# Altium PCB ControllerDiagrams.PcbDoc
Units mm, origin at the board's own origin, x right, y up, seen from the top; angles counter-clockwise.
Board outline 95.76 x 51.94 mm, 2 copper layers (Top Layer, Bottom Layer); 66 components, 43 nets, 282 pads, 67 vias.
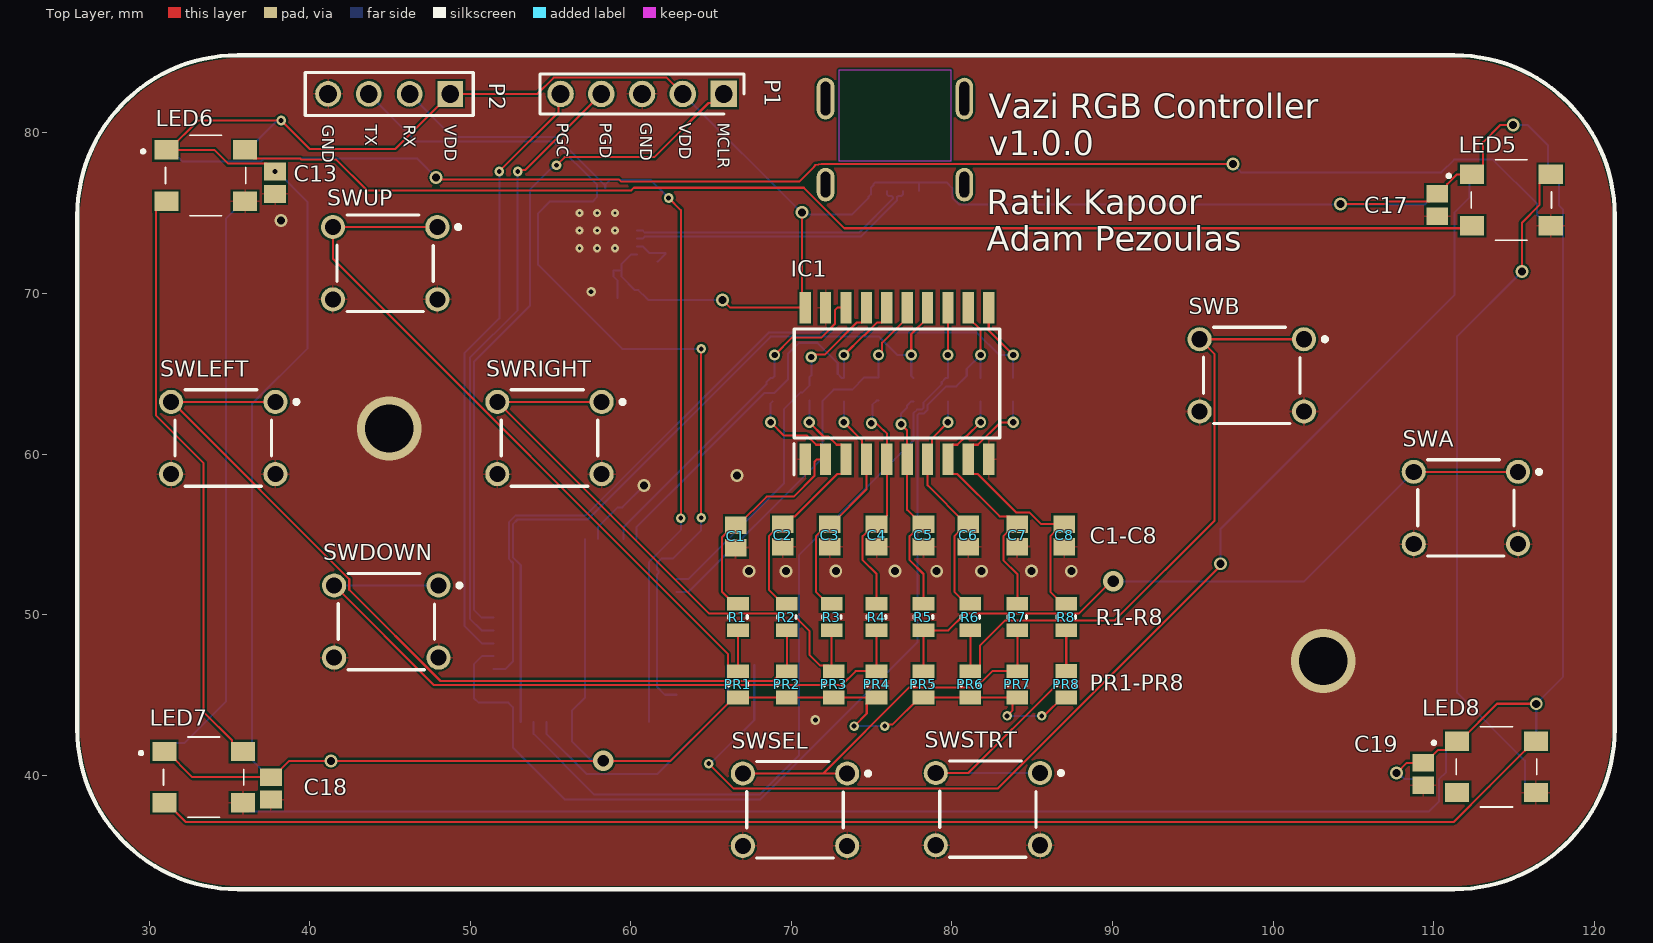
[diagram p0: Top Layer view]
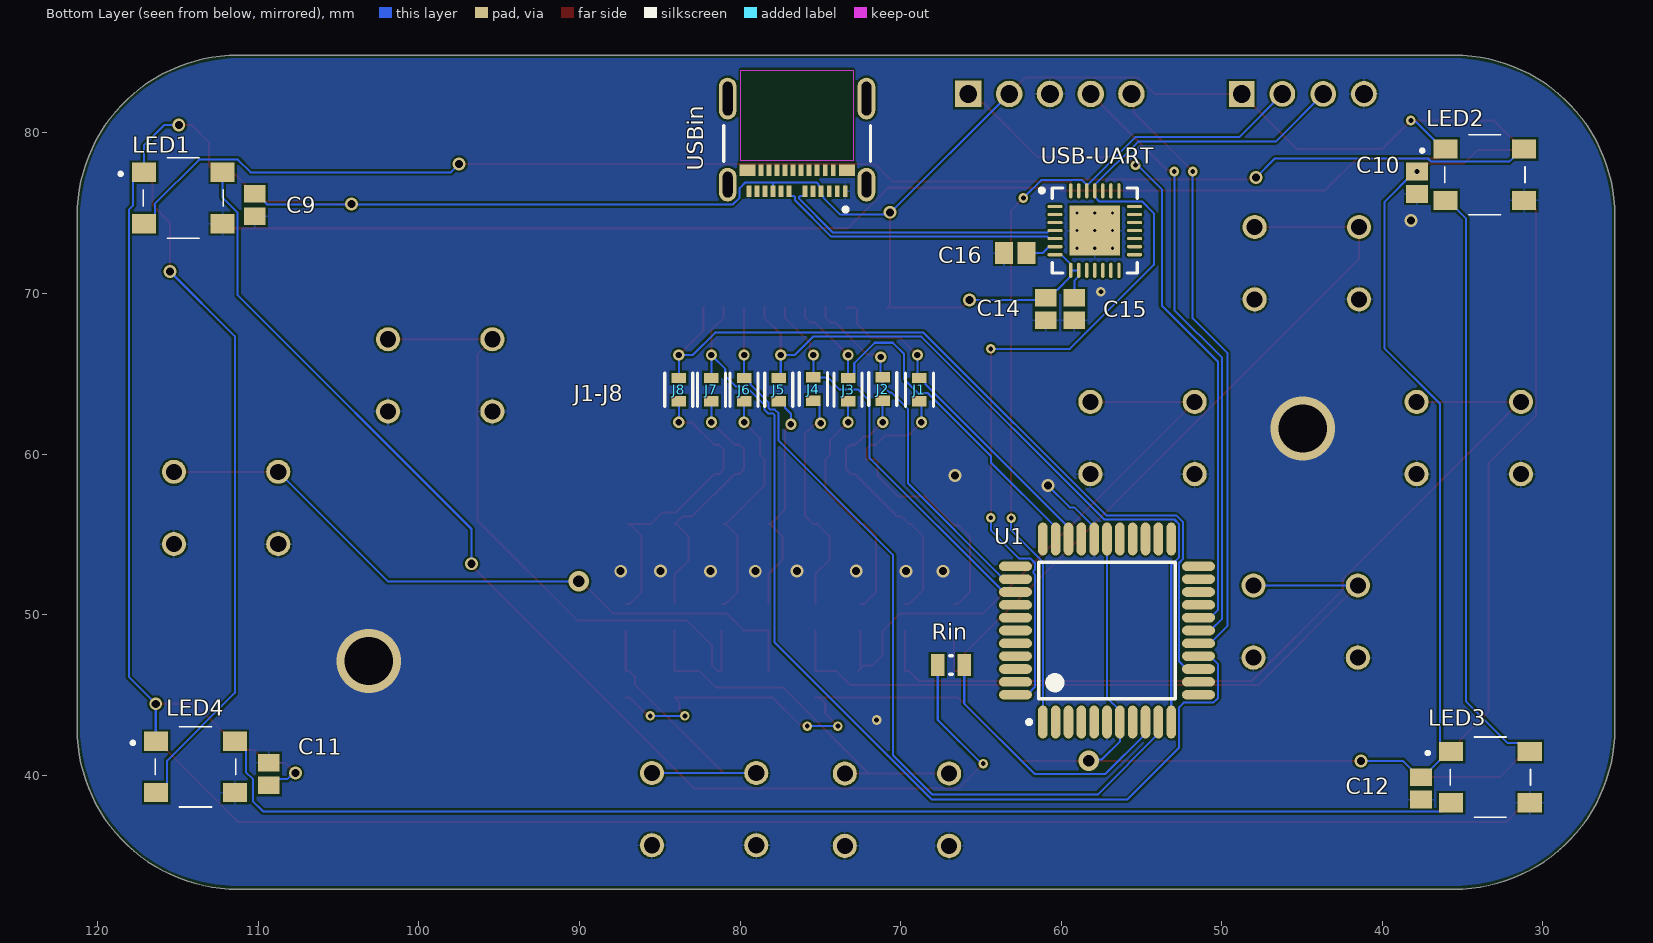
[diagram p1: Bottom Layer view, seen from below]
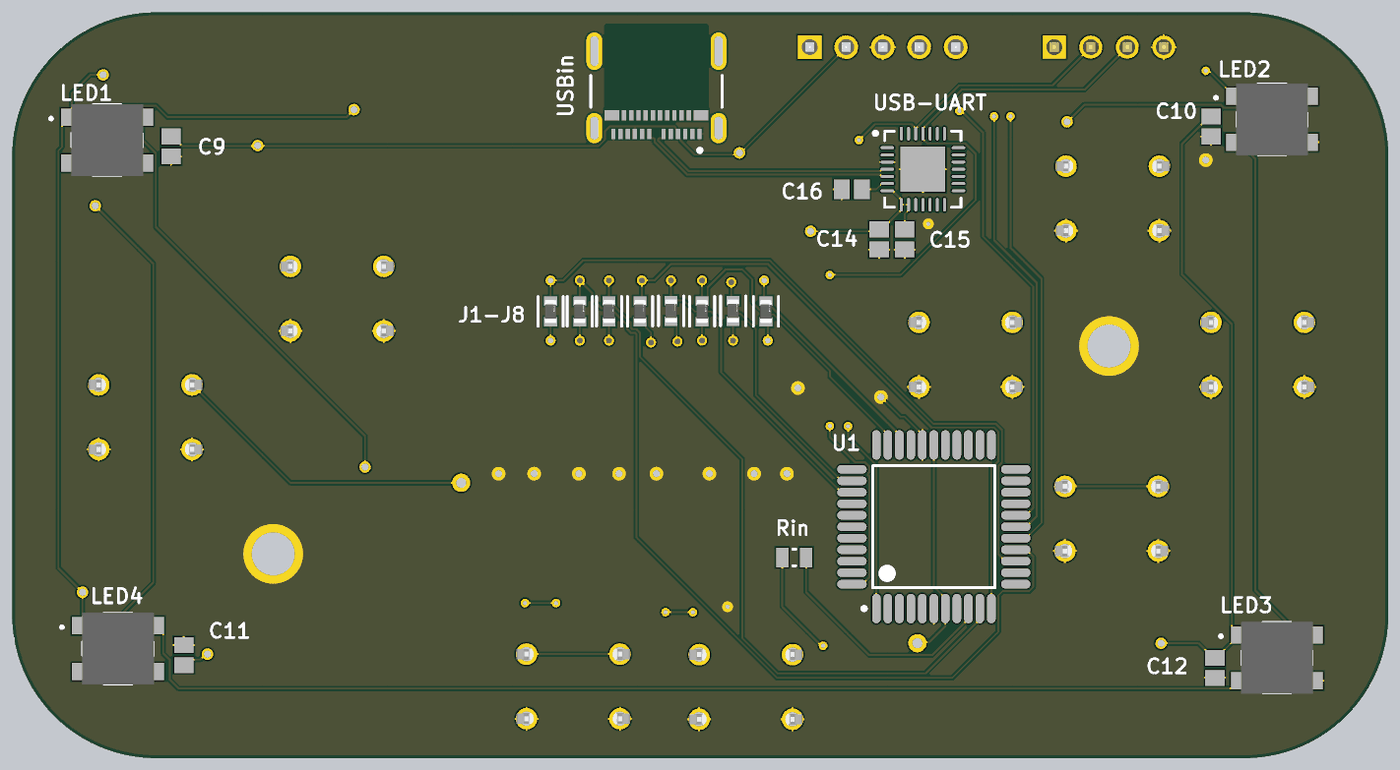
[diagram p2: 3D render of the assembled board from below, using the file's embedded part models]

## Layer stack, top to bottom
Top Solder: solder mask 0.0102, Solder Resist, Dk 3.5
Top Layer: signal copper 0.0356
Dielectric 1: dielectric 0.32, FR-4, Dk 4.8
Bottom Layer: signal copper 0.0356
Bottom Solder: solder mask 0.0102, Solder Resist, Dk 3.5

## Board outline
25.527,42.893 25.527,74.836 cw(c35.527,74.836) 35.527,84.836 111.285,84.836 cw(c111.285,74.836) 121.285,74.836 121.285,42.893 cw(c111.285,42.893) 111.285,32.893 35.527,32.893 cw(c35.527,42.893)

## Design rules (kind name [scope] priority, off if disabled: settings)
BoardOutlineClearance [All] p1: gap=0.2 ignorepadtopadclearanceinfootprint=FALSE
Clearance [All] p1: gap=0.127 ignorepadtopadclearanceinfootprint=FALSE except(0.25: Arc-Hole Track-Hole SMDPad-Hole THPad-Hole Via-Hole Fill-Hole Poly-Hole Region-Hole Text-Hole)
ComponentClearance [All] p1: gap=0.127 collisioncheckmode=3 verticalgap=0.127 showdistances=TRUE
DiffPairsRouting [All] p1: maxlimit=0.254 minlimit=0.127 mostfreqgap=0.127 toplayer_minwidth=0.127 toplayer_maxwidth=25.4 toplayer_prefwidth=0.127 bottomlayer_minwidth=0.127 bottomlayer_maxwidth=25.4 bottomlayer_prefwidth=0.127 maxuncoupledlength=12.7
Height [All] p1: minheight=0 maxheight=1816.048 prefheight=12.7
HoleSize [All] p1: absolutevalues=TRUE maxlimit=6.3 minlimit=0.2 maxpercent=80.000 minpercent=20.000
HoleToHoleClearance [All] p1: gap=0.25 allowstackedmicrovias=FALSE
MinimumAnnularRing [All] p1: minimumring=0.13
MinimumSolderMaskSliver [All] p1: minsoldermaskwidth=0
PlaneClearance [All] p1: clearance=0.127
PlaneConnect PlaneConnectPowerPads [InPadClass('PowerPads')] p1: planeconnectstyle=Direct reliefexpansion=0.508 reliefentries=4 reliefconductorwidth=0.254 reliefairgap=0.254
PlaneConnect [All] p2: pad.planeconnectstyle=Relief pad.reliefexpansion=0.3 pad.reliefentries=4 pad.reliefconductorwidth=0.127 pad.reliefairgap=0.127 via.planeconnectstyle=Direct via.reliefexpansion=0.3 via.reliefentries=4 via.reliefconductorwidth=0.127 via.reliefairgap=0.127
PolygonConnect PolygonConnectPowerPads [All vs (InPadClass('PowerPads'))] p1: connectstyle=Direct reliefconductorwidth=0.254 reliefentries=4 polygonreliefangle="90 Angle" airgapwidth=0.254
PolygonConnect [All] p2: thpad.connectstyle=Relief thpad.reliefconductorwidth=0.127 thpad.reliefentries=4 thpad.polygonreliefangle="90 Angle" thpad.airgapwidth=0.127 smdpad.connectstyle=Relief smdpad.reliefconductorwidth=0.127 smdpad.reliefentries=4 smdpad.polygonreliefangle="90 Angle" smdpad.airgapwidth=0.127 via.connectstyle=Direct via.reliefconductorwidth=0.127 via.reliefentries=4 via.polygonreliefangle="90 Angle" via.airgapwidth=0.127
RoutingLayers NoAutoRoute [InNet('GND')] p1: top layer_v5=FALSE bottom layer_v5=FALSE
RoutingLayers [All] p2: top layer_v5=TRUE bottom layer_v5=TRUE
RoutingVias [All] p1: holewidth=0.3 width=0.6 viastyle="Through Hole" minholewidth=0.3 minwidth=0.6 maxholewidth=0.6 maxwidth=6.6
SilkToSilkClearance [All] p1: silktosilkclearance=0
SilkToSolderMaskClearance [IsPad] p1: minsilkscreentomaskgap=0.127 clearancetoexposedcopper=TRUE
SolderMaskExpansion [All] p1: expansion=0.075 istentingtop=FALSE
Width [All] p1: maxlimit=25.4 minlimit=0.127 preferedwidth=0.127 minimp=50.000000 maximp=50.000000 favimp=50.000000
19 further rules are at their usual default settings.

## Classes and differential pairs
differential pair USB: +USB_P -USB_N

## Components (designator, comment, footprint, x,y, rotation, side; value= is the part's Value field where it differs from the comment)
C1 "100nF" CAPC2013X140X50LL20T25 66.548,54.864 r90 top
C2 "100nF" CAPC2013X140X50LL20T25 69.469,54.929 r90 top
C3 "100nF" CAPC2013X140X50LL20T25 72.39,54.929 r90 top
C4 "100nF" CAPC2013X140X50LL20T25 75.311,54.929 r90 top
C5 "100nF" CAPC2013X140X50LL20T25 78.232,54.929 r90 top
C6 "100nF" CAPC2013X140X50LL20T25 81.026,54.929 r90 top
C7 "100nF" CAPC2013X140X50LL20T25 84.074,54.929 r90 top
C8 "100nF" CAPC2013X140X50LL20T25 86.995,54.929 r90 top
C9 "10uF" CAPC2013X140X50LL20T25 110.236,75.5 r90 bottom
C10 "10uF" CAPC2013X140X50LL20T25 37.846,76.897 r90 bottom
C11 "10uF" CAPC2013X140X50LL20T25 109.347,40.067 r270 bottom
C12 "10uF" CAPC2013X140X50LL20T25 37.592,39.178 r90 bottom
C13 "10uF" CAPC2013X140X50LL20T25 37.846,76.897 r90 top
C14 "1uF" CAPC2013X140X50LL20T25 60.96,69.023 r90 bottom
C15 "0.1uF" CAPC2013X140X50LL20T25 59.182,69.023 r90 bottom
C16 "100nF" CAPC2013X140X50LL20T25 62.865,72.517 r0 bottom
C17 "10uF" CAPC2013X140X50LL20T25 110.236,75.5 r90 top
C18 "10uF" CAPC2013X140X50LL20T25 37.592,39.178 r90 top
C19 "10uF" CAPC2013X140X50LL20T25 109.347,40.067 r90 top
IC1 "74HCT7541D,118" SOIC127P1032X265-20N 76.581,64.389 r90 top
J1 "" FP-ERJ-3GEY0R00V-MFG 68.834,64.008 r270 bottom value=0Ω
J2 "" FP-ERJ-3GEY0R00V-MFG 71.12,64.045 r270 bottom value=0Ω
J3 "" FP-ERJ-3GEY0R00V-MFG 73.279,64.008 r270 bottom value=0Ω
J4 "" FP-ERJ-3GEY0R00V-MFG 75.438,64.045 r270 bottom value=0Ω
J5 "" FP-ERJ-3GEY0R00V-MFG 77.597,64.008 r270 bottom value=0Ω
J6 "" FP-ERJ-3GEY0R00V-MFG 79.756,64.008 r270 bottom value=0Ω
J7 "" FP-ERJ-3GEY0R00V-MFG 81.788,64.008 r270 bottom value=0Ω
J8 "" FP-ERJ-3GEY0R00V-MFG 83.82,64.008 r270 bottom value=0Ω
LED1 "SK6812" ILPHK501RGBWSK68120501 114.681,75.946 r180 bottom
LED2 "SK6812" ILPHK501RGBWSK68120501 33.618,77.394 r180 bottom
LED3 "SK6812" ILPHK501RGBWSK68120501 33.274,39.878 r180 bottom
LED4 "SK6812" ILPHK501RGBWSK68120501 113.919,40.513 r180 bottom
LED5 "SK6812" ILPHK501RGBWSK68120501 114.845,75.82 r0 top
LED6 "SK6812" ILPHK501RGBWSK68120501 33.528,77.343 r0 top
LED7 "SK6812" ILPHK501RGBWSK68120501 33.401,39.878 r0 top
LED8 "SK6812" ILPHK501RGBWSK68120501 113.919,40.513 r0 top
P1 "Programmer" HDRV5W64P0X254_1X5_1270X248X838P 65.786,82.423 r0 top
P2 "UART Breakout" 61300411121 44.958,82.423 r180 top
PR1 "10K" RESC2013X50X30LL20T20 66.675,45.656 r270 top
PR2 "10K" RESC2013X50X30LL20T20 69.723,45.656 r270 top
PR3 "10K" RESC2013X50X30LL20T20 72.644,45.656 r270 top
PR4 "10K" RESC2013X50X30LL20T20 75.311,45.656 r270 top
PR5 "10K" RESC2013X50X30LL20T20 78.232,45.656 r270 top
PR6 "10K" RESC2013X50X30LL20T20 81.153,45.656 r270 top
PR7 "10K" RESC2013X50X30LL20T20 84.074,45.656 r270 top
PR8 "10K" RESC2013X50X30LL20T20 87.122,45.657 r270 top
R1 "1K" RESC2013X50X30LL20T20 66.675,49.847 r90 top
R2 "1K" RESC2013X50X30LL20T20 69.723,49.847 r90 top
R3 "1K" RESC2013X50X30LL20T20 72.517,49.847 r90 top
R4 "1K" RESC2013X50X30LL20T20 75.311,49.847 r90 top
R5 "1K" RESC2013X50X30LL20T20 78.232,49.847 r90 top
R6 "1K" RESC2013X50X30LL20T20 81.153,49.847 r90 top
R7 "1K" RESC2013X50X30LL20T20 84.074,49.847 r90 top
R8 "1K" RESC2013X50X30LL20T20 87.122,49.847 r90 top
Rin "470" RESC2013X50X30LL20T20 66.866,46.863 r0 bottom
SWA "6x6" ESWI-TL1105SPF_V 112.014,56.642 r180 top
SWB "6x6" ESWI-TL1105SPF_V 98.679,64.897 r180 top
SWDOWN "6x6" ESWI-TL1105SPF_V 44.779,49.566 r180 top
SWLEFT "6x6" ESWI-TL1105SPF_V 34.619,60.996 r180 top
SWRIGHT "6x6" ESWI-TL1105SPF_V 54.939,60.996 r180 top
SWSEL "6x6" ESWI-TL1105SPF_V 70.231,37.846 r180 top
SWSTRT "6x6" ESWI-TL1105SPF_V 82.244,37.882 r180 top
SWUP "6x6" ESWI-TL1105SPF_V 44.704,71.882 r180 top
U1 "PIC18F45K42-I/PT" TQFP-PT44_M 57.15,49.007 r90 bottom
USB-UART "CP2102-GMR" SLAB-QFN-28-3125x3125TP_M 57.912,73.914 r180 bottom
USBin "1054500101" FP-1054500101-MFG 76.454,80.137 r0 bottom

## Footprints (in the part's own frame and the unit in brackets; to place one, negate y for a bottom-side part, rotate by r counter-clockwise, add the part's x,y. Pads: shape width x height; smd on the part's side, far side on the other; paste and mask are expansions set on the pad)
61300411121 [mm] "Pin Header, pitch 2.54 mm, THT, Vertical, single row, 4p"
  rect 1.6x1.6 hole 1.1: 1(-3.81,0)
  round 1.6 hole 1.1: 2(-1.27,0) 3(1.27,0) 4(3.81,0)
  silkscreen extent -5.23,-1.34 5.23,1.34, body extent -5.08,-1.27 5.08,1.27, height 8.57
CAPC2013X140X50LL20T25 [mm] "Chip Capacitor, 2-Leads, Body 2.00x1.25mm, IPC High Density"
  rect 1.1x1.35 smd: 1(-0.7,0) 2(0.7,0)
  body extent -1.1,-0.72 1.1,0.72, height 1.4
ESWI-TL1105SPF_V [mm] "THD, 4-Leads, Body 6x6mm"
  round 1.5 hole 1: 1(-3.25,-2.25) 2(3.25,-2.25) 3(-3.25,2.25) 4(3.25,2.25)
  silkscreen extent -4.68,-3 3,3, body extent -3.95,-3 3.95,3, height 7.4
FP-1054500101-MFG [mm]
  rrect100% 1.1x2.1 hole 1.6 slot 0.6 at 0 deg paste-1000 mask+0: 1(-4.32,3.36) 2(4.32,3.36)
  rrect100% 1.1x2.6 hole 2.1 slot 0.6 at 0 deg paste-1000 mask+0: 3(-4.32,-2) 4(4.32,-2)
  rect 0.3x0.7 smd paste+0 mask+0: A1(-3,3.77) A2(-2.5,3.77) A3(-2,3.77) A4(-1.5,3.77) A5(-1,3.77) A6(-0.5,3.77) A7(0.5,3.77) A8(1,3.77) A9(1.5,3.77) A10(2,3.77) A11(2.5,3.77) A12(3,3.77) B2(2.25,2.47) B3(1.75,2.47) B4(1.25,2.47) B5(0.75,2.47) B6(0.25,2.47) B7(-0.25,2.47) B8(-0.75,2.47) B9(-1.25,2.47) B10(-1.75,2.47) B11(-2.25,2.47)
  rect 1x0.7 smd paste+0 mask+0: B1(3.1,2.47) B12(-3.1,2.47)
  Keep-Out Layer region: -3.5,1.88 3.5,1.88 3.5,-3.77 -3.5,-3.77
  silkscreen extent -4.57,-0.3 4.57,5.03
FP-ERJ-3GEY0R00V-MFG [mm]
  rect 0.65x0.9 smd paste+0 mask+0: 1(-0.725,0) 2(0.725,0)
  silkscreen extent -1.03,-0.87 1.03,0.87, body extent -0.8,-0.4 0.8,0.4, height 0.55
HDRV5W64P0X254_1X5_1270X248X838P [mm]
  rect 1.65x1.65 hole 1.1: 1(0,0)
  round 1.65 hole 1.1: 2(-2.54,0) 3(-5.08,0) 4(-7.62,0) 5(-10.16,0)
  silkscreen extent -11.43,-1.24 1.27,1.24, body extent -11.43,-1.24 1.27,1.24, height 8.38
ILPHK501RGBWSK68120501 [mm]
  rect 1.5x1.2 smd: 1(-2.45,1.6) 2(2.45,1.6) 3(2.45,-1.6) 4(-2.45,-1.6)
  silkscreen extent -4,-2.5 2.5,2.5, body extent -2.5,-2.5 2.5,2.5, height 1.8
RESC2013X50X30LL20T20 [mm] "Chip Resistor, 2-Leads, Body 2.00x1.25mm, IPC High Density"
  rect 0.85x1.35 smd: 1(-0.825,0) 2(0.825,0)
  silkscreen extent -0.1,-0.58 0.1,0.58, body extent -1.1,-0.72 1.1,0.72, height 0.5
SLAB-QFN-28-3125x3125TP_M [mm] "QFN, 28-Leads, Body 5x5mm, Pitch 0.5mm, Thermal Pad 3.13x3.13mm, IPC Low Density"
  oval 0.95x0.2 smd: 1(-2.475,1.5) 2(-2.475,1) 3(-2.475,0.5) 4(-2.475,0) 5(-2.475,-0.5) 6(-2.475,-1) 7(-2.475,-1.5) 15(2.475,-1.5) 16(2.475,-1) 17(2.475,-0.5) 18(2.475,0) 19(2.475,0.5) 20(2.475,1) 21(2.475,1.5)
  oval 0.2x0.95 smd: 8(-1.5,-2.475) 9(-1,-2.475) 10(-0.5,-2.475) 11(0,-2.475) 12(0.5,-2.475) 13(1,-2.475) 14(1.5,-2.475) 22(1.5,2.475) 23(1,2.475) 24(0.5,2.475) 25(0,2.475) 26(-0.5,2.475) 27(-1,2.475) 28(-1.5,2.475)
  rect 3.13x3.13 smd: 29(0,0)
  silkscreen extent -3.42,-2.65 2.65,2.65, body extent -2.5,-2.5 2.5,2.5, height 1
SOIC127P1032X265-20N [mm]
  rect 1.95x0.7 smd: 1(-4.725,5.715) 2(-4.725,4.445) 3(-4.725,3.175) 4(-4.725,1.905) 5(-4.725,0.635) 6(-4.725,-0.635) 7(-4.725,-1.905) 8(-4.725,-3.175) 9(-4.725,-4.445) 10(-4.725,-5.715) 11(4.725,-5.715) 12(4.725,-4.445) 13(4.725,-3.175) 14(4.725,-1.905) 15(4.725,-0.635) 16(4.725,0.635) 17(4.725,1.905) 18(4.725,3.175) 19(4.725,4.445) 20(4.725,5.715)
  silkscreen extent -5.7,-6.4 3.4,6.42, body extent -5.16,-6.4 5.16,6.4, height 2.65
TQFP-PT44_M [mm] "Thin QFP, 44-Leads, Body 10x10mm, Pitch 0.8mm, IPC Low Density"
  oval 2.05x0.6 smd: 1(-5.7,4) 2(-5.7,3.2) 3(-5.7,2.4) 4(-5.7,1.6) 5(-5.7,0.8) 6(-5.7,0) 7(-5.7,-0.8) 8(-5.7,-1.6) 9(-5.7,-2.4) 10(-5.7,-3.2) 11(-5.7,-4) 23(5.7,-4) 24(5.7,-3.2) 25(5.7,-2.4) 26(5.7,-1.6) 27(5.7,-0.8) 28(5.7,0) 29(5.7,0.8) 30(5.7,1.6) 31(5.7,2.4) 32(5.7,3.2) 33(5.7,4)
  oval 0.6x2.05 smd: 12(-4,-5.7) 13(-3.2,-5.7) 14(-2.4,-5.7) 15(-1.6,-5.7) 16(-0.8,-5.7) 17(0,-5.7) 18(0.8,-5.7) 19(1.6,-5.7) 20(2.4,-5.7) 21(3.2,-5.7) 22(4,-5.7) 34(4,5.7) 35(3.2,5.7) 36(2.4,5.7) 37(1.6,5.7) 38(0.8,5.7) 39(0,5.7) 40(-0.8,5.7) 41(-1.6,5.7) 42(-2.4,5.7) 43(-3.2,5.7) 44(-4,5.7)
  silkscreen extent -5.82,-4.25 4.25,4.98, body extent -5,-5 5,5, height 1.2

## Part data
C1 C2 C3 C4 C5 C6 C7 C8 C9 C10 C11 C12 C13 C14 C15 C16 C17 C18 C19: library part CMP-2000-05810-1, "Chip Capacitor, 2.2 uF, +/- 10%, 10 V, -55 to 85 degC, 0805 (2012 Metric), RoHS, Tape and Reel", Capacitance=2.2µF, Case Size/Dimension=0805, Dielectric=X5R, Manufacturer=AVX, Package Description="2-Pin Surface Mount Device, Body 2.01 x 1.25 mm", Rated Voltage=10V, Tolerance (%)=±10%, Datasheet URL=http://datasheets.avx.com/cx5r.pdf, Datasheet Version=05/2016, Manufacturer URL=http://www.avx.com/, Mounting Technology=SurfaceMount, Package Reference=0805
IC1: "Integrated Circuit", Manufacturer_Name=Nexperia, Mouser Part Number=771-74HCT7541D-T, Arrow Part Number=74HCT7541D,118, Arrow Price/Stock=https://www.arrow.com/en/products/74hct7541d118/nexperia, Datasheet Link=https://assets.nexperia.com/documents/data-sheet/74HC_HCT7541.pdf, Height=2.65mm, Manufacturer_Part_Number=74HCT7541D,118, Mouser Price/Stock=https://www.mouser.co.uk/ProductDetail/Nexperia/74HCT7541D118?qs=me8TqzrmIYUuRbgAkVALbQ%3D%3D
J1 J2 J3 J4 J5 J6 J7 J8: library part CMP-2000-00700-2, "RES SMD 0 OHM JUMPER 1/10W 0603", Manufacturer=Panasonic, Manufacturer Part Number=ERJ-3GEY0R00V, Package=0603, Power Rating=0.1W, Resistance=0Ω, Temperature="-55°C to +155°C", Temperature Coefficient=-100/+600ppm/°C, Temperature Range High=+155°C, Temperature Range Low=-55°C, Tolerance=5%, Voltage Rating=75V, Automotive=Yes, Automotive Grade="Grade 0", Category=Res, ComponentLink2Description=Datasheet, ComponentLink2URL=https://industrial.panasonic.com/cdbs/www-data/pdf/RDA0000/AOA0000C301.pdf, Composition="Thick Film", Device Class L1="Passive Components", Device Class L2=Resistors, Device Class L3="Chip SMD Resistors", Digikey Description="RES SMD 0 OHM JUMPER 1/10W 0603", Footprint Url=https://industrial.panasonic.com/cdbs/www-data/pdf/RDA0000/DMA0000COL17.pdf, Height=0.55mm, Ipc Land Pattern Name=RESC16080X45, Lead Free=Yes, Mouser Description="Resistor, Chip Thick Film, 0 Ohm, 0.1w, Resistor, Chip Thick Film, 0 Ohm, 0.1w, 5%", Octopart=https://octopart.com/erj-3gey0r00v-panasonic-55389238, RoHS=TRUE, Series=ERJ
LED1 LED2 LED3 LED4 LED5 LED6 LED7 LED8: library part ILPH-K501-RGBW-SK6812-05-01, "LED", Manufacturer_Name="Intelligent LED Solutions", Datasheet Link=http://uk.rs-online.com/web/p/products/1921700, Height=1.7mm, Manufacturer_Part_Number=ILPH-K501-RGBW-SK6812-05-01
P1: library part HTSW-105-07-L-S, "Connector", Manufacturer_Name=SAMTEC, Mouser Part Number=200-HTSW10507LS, Datasheet Link=https://componentsearchengine.com/Datasheets/2/HTSW-105-07-L-S.pdf, Height=8.38mm, Manufacturer_Part_Number=HTSW-105-07-L-S, Mouser Price/Stock=https://www.mouser.co.uk/ProductDetail/Samtec/HTSW-105-07-L-S?qs=0lQeLiL1qybu1UQ%2Fa8lryA%3D%3D
P2: library part CMP-1502-01064-1, "THT Vertical Pin Header WR-PHD, Pitch 2.54 mm, Single Row, 4 pins", Contact Resistance=20mOhm, Manufacturer="Wurth Elektronik", Operating Temperature=-40to105degC, Package Reference=61300411121, Rated Current=3A, Withstanding Voltage=500VAC, Working Voltage=250VAC, Datasheet URL=https://katalog.we-online.de/em/datasheet/6130xx11121.pdf, Gender=Male, Manufacturer URL=http://www.we-online.de, Mounting Technology=THT, Orientation=Vertical, Packaging=Bag, Part Number=61300411121, Pin Number=4, Pitch=2.54mm, Publisher=WurthElektronik, Row Number=Single
PR1 PR2 PR3 PR4 PR5 PR6 PR7 PR8 R1 R2 R3 R4 R5 R6 R7 R8 Rin: library part CMP-2001-04896-1, Manufacturer="Vishay Dale", Part Number=CRCW08050000Z0EA
SWA SWB SWDOWN SWLEFT SWRIGHT SWSEL SWSTRT SWUP: library part CMP-2000-07248-1, "Tact Switch, SPST-NO, 50 mA, 12 VDC, -20 to 70 degC, 4-Pin THD, RoHS, Bulk", Manufacturer=E-Switch, Package Description="4-Pin Through Hole Device, Body 6 x 6 mm", Package Reference=TL1105SPF, Actuation Force=1.6N, Actuator Style=RoundButton, Contact Material=Silver, Datasheet URL=https://www.e-switch.com/system/asset/product_line/data_sheet/140/TL1105.pdf, Datasheet Version=12/2013, Manufacturer URL=http://www.e-switch.ch/en/, Mounting Technology=ThroughHole, Package URL=http://spec_sheets.e-switch.com/specs/P010201.pdf, Size=6x6mm, Termination Style=RightAngle
U1: library part CMP-0115-00678-1, "Enhanced FLASH Microcontroller, 8K (x14-Bit words) FLASH, 368 Bytes RAM, 44-Pin TQFP, Standard VDD Range, Industrial Temperature", Code_JEDEC=MS-026, ComponentAvailability="Unknown. Contact manufacturer to determine status.", DatasheetVersion="revB, Oct-2003", PackageDescription="44-Lead Plastic Thin Quad Flatpack (PT) - 10x10x1mm Body, 2.00mm [TQFP]", PackageReference=TQFP-PT44, PackageVersion="revBB, Aug-2009"
USB-UART: library part CMP-2000-04924-1, "Single-Chip USB to URAT Bridge, 3.3 V, -40 to 85 degC, 28-Pin QFN, RoHS, Tape and Reel", Manufacturer="Silicon Labs", Operating Supply Voltage (Max)=3.6V, Operating Supply Voltage (Min)=3V, Operating Supply Voltage (Typ)=3.3V, Operating Temperature (Max)=85C, Operating Temperature (Min)=-40C, Operating Temperature Classification=Industrial, Package Description="28-Pin Quad-Flat No-Leads Package, Body 5 x 5 mm, Pitch 0.5 mm", Package Reference=QFN-28, Package Type=QFNEP, Supply Current=26mA, Data Rate=1000kbps, Datasheet URL=http://www.mouser.com/ds/2/368/CP2102-9-247052.pdf, Datasheet Version="Rev. 1.6, 12/2013", Interface Circuit Standard 1=RS-232, Manufacturer URL=http://www.silabs.com/, Mounting=SurfaceMount, Number of Channels=1, Package URL=http://www.silabs.com/Support%20Documents/TechnicalDocs/C8051T61x.pdf, Packaging=TapeandReel, Pin Count=28, Rad Hardened=No, Transmitter and Receiver FIFO Counter=No
USBin: library part CMP-04767-000004-1, "CONN RCP USB3.1 TYPEC 24P SMD RA", Current Rating=0.25/1.25/5A, Manufacturer=Molex, Package=0, Temperature="-30°C to +85°C", Temperature Range High=+85°C, Temperature Range Low=-30°C, Voltage Rating=30V, Automotive=No, Category=Conn, ComponentLink2Description=Datasheet, ComponentLink2URL=https://www.molex.com/webdocs/datasheets/pdf/en-us/1054500101_IO_CONNECTORS.pdf, Conn Orientation="Right Angle", Contact Material=Gold,Nickel, Device Class L1=Connectors, Device Class L2="USB Connectors", Device Class L3=unset, Digikey Description="CONN RCP USB3.1 TYPEC 24P SMD RA", Footprint Url=https://www.molex.com/pdm_docs/sd/1054500101_sd.pdf, Height=3.44mm, Is Female=yes, Lead Free=Yes, Manufacturer Part Number=1054500101, Mouser Description="USB Shielded I/O Receptacle; Type C; Right Angle; Surface Mount; Gold over Nickel", Number Of Contacts=24, Octopart=https://octopart.com/105450-0101-molex-68082325, Pitch=0.5mm, RoHS=TRUE, Shielding=true, Usb Standard="USB 3.1"

## Via types
v1: diameter 0.8, hole 0.5, Top Layer to Bottom Layer, 22 vias
v2: diameter 0.6, hole 0.3, Top Layer to Bottom Layer, 16 vias
v3: diameter 0.7, hole 0.4, Top Layer to Bottom Layer, 16 vias
v4: diameter 0.5, hole 0.2, Top Layer to Bottom Layer, 9 vias
v5: diameter 4, hole 3, Top Layer to Bottom Layer, 2 vias
v6: diameter 1.27, hole 0.711, Top Layer to Bottom Layer, 2 vias

## Nets (pads, with @x,y where several pads share a name; then routed paths per layer and width w, separated by ;. In a path a pad name is that pad's centre, name@x,y a point inside that pad or via, vN(x,y) a via of type N, cw(c..) or ccw(c..) an arc to the next point about the centre after c; other vN are vias at no path point)
+5: C9.2 C10.2 C11.2 C12.2 C13.2 C14.2 C15.2 C17.2 C18.2 C19.2 IC1.20 LED1.1 LED2.1 LED3.1 LED4.1 LED5.1 LED6.1 LED7.1 LED8.1 P1.2 P2.1 PR1.2 PR2.2 PR3.2 PR4.2 PR5.2 PR6.2 PR7.2 PR8.2 U1.7 U1.28 USB-UART.7 USB-UART.8 USB-UART.9 USBin.A4 USBin.A9 | length 313.1
  Top Layer w0.127: LED6.1 LED6.1@31.228,78.943 ; LED7.1@31.101,41.478 32.701,39.878 C18.2 37.717,39.878 38.733,40.894 v6(58.293,40.894) 62.488,40.894 66.425,44.831 PR1.2 PR2.2 PR3.2 PR4.2@75.061,44.831 ; v2(37.846,77.597) 37.359,78.084 34.929,78.084 34.07,78.943 LED6.1@31.228,78.943 ; P1.2 62.231,83.438 55.205,83.438 54.19,82.423 P2.1 45.339,78.994 40.005,78.994 v2(38.227,80.772) 33.057,80.772 LED6.1@31.228,78.943 ; v1(65.722,69.591) 66.199,69.114 IC1.20 70.675,69.305 v1(70.675,75.052) ; v2(73.914,43.053) 74.7,43.839 74.7,44.469 PR4.2@75.061,44.831 ; PR4.2 PR4.2@75.061,44.831 ; v2(75.819,43.053) 75.91,43.144 76.295,43.144 77.982,44.831 PR5.2 PR6.2 PR7.2 83.786,44.543 83.786,44.035 v2(83.439,43.688) ; v2@85.818,43.779 86.872,44.832 PR8.2 ; v1(104.203,75.56) 106.992,75.56 107.146,75.713 C17.2@109.749,75.713 ; v1(107.696,40.132) 108.331,40.767 C19.2 109.472,40.767 110.281,41.576 110.932,41.576 LED8.1 111.619,42.113 113.951,44.445 v1(116.395,44.445) ; C17.2 110.361,76.2 110.847,76.687 110.847,76.811 111.456,77.42 LED5.1 112.545,77.42 113.082,77.956 113.082,79.427 114.144,80.489 v1(114.958,80.489)
  Bottom Layer w0.127: LED3.1@35.874,41.478 36.981,40.371 36.981,40.365 37.467,39.878 C12.2 37.717,39.878 38.728,40.889 v1(41.338,40.889) ; LED2.1@36.218,78.994 37.905,80.681 38.136,80.681 v2(38.227,80.772) ; LED3.1@36.41,41.914 36.41,63.118 39.878,66.585 39.878,75.69 C10.2@37.971,77.597 ; U1.28 57.15,44.832 56.35,44.032 U1.7 56.35,42.091 57.468,40.974 58.213,40.974 v6(58.293,40.894) ; C15.2 59.182,70.794 58.912,71.064 USB-UART.9 USB-UART.8 ; USB-UART.7 60.012,72.414 59.412,71.814 USB-UART.8 ; P1.2 70.739,74.93 73.786,74.93 74.795,75.938 74.795,76.008 74.954,76.167 USBin.A4 74.954,76.567 75.114,76.727 75.114,76.796 75.225,76.907 77.978,76.907 ; v1(65.722,69.591) 61.092,69.591 C14.2 60.473,70.21 60.267,70.21 59.412,71.064 USB-UART.8 ; v2(73.914,43.053) v2(75.819,43.053) ; USBin.A9 77.954,76.884 77.978,76.907 ; v2(83.439,43.688) v2(85.598,43.688) ; v1(107.696,40.132) 107.823,40.132 108.204,39.751 108.963,39.751 C11.2 ; C9.2 110.111,76.2 109.447,75.536 80.467,75.536 80.033,75.97 80.033,76.557 79.683,76.907 77.978,76.907 ; v1(114.958,80.489) 115.853,80.489 117.131,79.211 LED1.1 117.281,77.546 117.818,77.009 117.818,75.465 118.072,75.211 118.072,46.122 v1(116.395,44.445) 116.395,42.139 LED4.1
GND: C1.1 C2.1 C3.1 C4.1 C5.1 C6.1 C7.1 C8.1 C9.1 C10.1 C11.1 C12.1 C13.1 C14.1 C15.1 C16.2 C17.1 C18.1 C19.1 IC1.1 IC1.10 IC1.19 LED1.3 LED2.3 LED3.3 LED4.3 LED5.3 LED6.3 LED7.3 LED8.3 P1.3 P2.4 SWA.3 SWA.4 SWB.3 SWB.4 SWDOWN.3 SWDOWN.4 SWLEFT.3 SWLEFT.4 SWRIGHT.3 SWRIGHT.4 SWSEL.3 SWSEL.4 SWSTRT.3 SWSTRT.4 SWUP.3 SWUP.4 U1.6 U1.29 USB-UART.3 USB-UART.29 USBin.A1 USBin.A12 | length 4.7
  Bottom Layer w0.127: U1.29 57.95,55.432 59.194,56.676 59.47,56.676 v1(60.833,58.039)
  other v1: 67.373,52.7 69.659,52.7 72.771,52.705 76.454,52.705 79.057,52.7 81.851,52.7 84.963,52.705 87.439,52.7 66.611,58.669 38.227,74.549
  other v2: 71.501,43.434 57.531,70.104
  other v4: 56.812,72.814 57.912,72.814 59.012,72.814 56.812,73.914 57.912,73.914 59.012,73.914 56.812,75.014 57.912,75.014 59.012,75.014
  other v5: 103.124,47.117 44.958,61.595
NetC1_2: C1.2 IC1.2 J1.2 R1.2 | length 19.8
  Top Layer w0.127: R1.2 66.425,50.672 65.683,51.414 65.683,54.824 66.423,55.564 C1.2 66.673,55.564 68.459,57.35 70.146,57.35 71.445,58.649 71.445,59.514 71.595,59.664 IC1.2 72.136,60.289 71.849,60.575 71.549,60.575 70.974,61.151 69.532,61.151 v3(68.707,61.976)
  Bottom Layer w0.127: v3(68.707,61.976) 68.707,63.156 J1.2
NetC2_2: C2.2 IC1.3 J2.2 R2.2 | length 16.9
  Top Layer w0.127: R2.2 69.473,50.672 68.604,51.541 68.604,54.888 69.344,55.629 C2.2 69.956,56.115 70.229,56.115 72.865,58.752 73.119,58.752 73.406,59.039 IC1.3 73.406,60.289 73.119,60.575 72.819,60.575 72.305,61.089 72.007,61.089 v3(71.12,61.976)
  Bottom Layer w0.127: v3(71.12,61.976) J2.2
NetC3_2: C3.2 IC1.4 J3.2 R3.2 | length 15.2
  Top Layer w0.127: R3.2 72.267,50.672 71.525,51.414 71.525,54.888 72.265,55.629 C3.2 72.515,55.629 74.676,57.79 IC1.4 74.389,59.95 74.389,60.866 v3(73.279,61.976)
  Bottom Layer w0.127: v3(73.279,61.976) J3.2
NetC4_2: C4.2 IC1.5 J4.2 R4.2 | length 14.6
  Top Layer w0.127: v3(74.991,61.91) 75.3,61.91 75.721,61.488 75.743,61.488 75.946,61.286 IC1.5 75.946,56.139 75.436,55.629 C4.2 75.186,55.629 74.446,54.888 74.446,53.394 75.311,52.528 R4.2
  Bottom Layer w0.127: v3(74.991,61.91) 75.051,61.97 75.051,63.059 75.313,63.32 J4.2
NetC5_2: C5.2 IC1.6 J5.2 R5.2 | length 14.5
  Top Layer w0.127: v3(76.835,61.849) 76.835,61.847 77.216,61.466 77.216,56.52 C5.2@78.107,55.629 ; R5.2 78.232,52.528 77.367,53.394 77.367,54.888 C5.2@78.107,55.629 ; C5.2 C5.2@78.107,55.629
  Bottom Layer w0.127: v3@76.725,61.959 v3(76.835,61.849) 76.835,62.521 77.21,62.896 77.21,63.021 77.472,63.283 J5.2
NetC6_2: C6.2 IC1.7 J6.2 R6.2 | length 15.1
  Top Layer w0.127: v3(79.756,61.976) 78.773,60.993 78.773,59.95 IC1.7 78.486,58.044 C6.2@80.901,55.629 ; C6.2 C6.2@80.901,55.629 ; R6.2 80.903,50.672 80.161,51.414 80.161,54.888 C6.2@80.901,55.629
  Bottom Layer w0.127: v3(79.756,61.976) J6.2
NetC7_2: C7.2 IC1.8 J7.2 R7.2 | length 16.8
  Top Layer w0.127: v3(81.788,61.976) 80.901,61.089 80.857,61.089 80.343,60.575 80.043,60.575 79.756,60.289 IC1.8 79.756,59.039 80.043,58.752 80.343,58.752 82.98,56.115 83.587,56.115 C7.2 83.949,55.629 83.209,54.888 83.209,53.394 84.074,52.528 R7.2
  Bottom Layer w0.127: v3(81.788,61.976) J7.2
NetC8_2: C8.2 IC1.9 J8.2 R8.2 | length 19.3
  Top Layer w0.127: v3(83.82,61.976) 83.801,61.957 82.995,61.957 81.613,60.575 81.313,60.575 81.026,60.289 IC1.9 81.026,59.039 81.313,58.752 81.613,58.752 83.996,56.369 84.828,56.369 85.568,55.629 C8.2@86.87,55.629 ; C8.2 C8.2@86.87,55.629 ; R8.2 86.872,50.672 86.13,51.414 86.13,54.888 C8.2@86.87,55.629
  Bottom Layer w0.127: v3(83.82,61.976) J8.2
NetC16_1: C16.1 USB-UART.6 | length 2.7
  Bottom Layer w0.127: USB-UART.6 60.762,72.914 61.159,72.517 C16.1 62.165,72.461 C16.1@61.678,71.975
NetIC1_11: IC1.11 J8.1 U1.14 | length 52.1
  Top Layer w0.127: IC1.11 82.296,67.691 v3(83.82,66.167)
  Bottom Layer w0.127: U1.14 52.175,46.607 52.665,47.098 52.665,53.21 52.406,53.47 52.406,55.74 52.842,56.177 57.193,56.177 68.58,67.564 81.558,67.564 82.955,66.167 v3(83.82,66.167) J8.1
NetIC1_12: IC1.12 J7.1 U1.15 | length 64.1
  Top Layer w0.127: IC1.12 81.026,68.489 81.788,67.727 v3(81.788,66.167)
  Bottom Layer w0.127: U1.15 50.725,47.407 50.234,46.917 50.234,44.804 50.522,44.517 52.378,44.517 52.66,44.235 52.66,42.379 52.665,42.373 52.665,41.696 55.879,38.482 68.073,38.482 77.851,48.26 77.851,62.422 77.942,62.513 78.231,62.513 78.492,62.774 78.492,63.063 79.646,64.218 80.285,64.218 80.927,64.86 80.927,65.306 v3(81.788,66.167) J7.1
NetIC1_13: IC1.13 J6.1 U1.10 | length 51.8
  Top Layer w0.127: v3(79.756,66.167) IC1.13
  Bottom Layer w0.127: U1.10 53.95,42.57 57.732,38.788 68.019,38.788 70.485,41.253 70.485,53.721 77.597,60.833 77.597,62.528 77.837,62.767 78.126,62.767 78.238,62.879 78.238,63.215 79.369,64.347 79.369,64.472 79.631,64.733 J6.1 v3(79.756,66.167)
NetIC1_14: IC1.14 J5.1 U1.11 | length 47.5
  Top Layer w0.127: v3(77.47,66.167) 77.47,67.473 78.486,68.489 IC1.14
  Bottom Layer w0.127: U1.11 53.15,53.085 52.66,53.575 52.66,55.635 52.947,55.923 57.32,55.923 68.707,67.31 75.462,67.31 76.605,66.167 v3(77.47,66.167) 77.47,64.86 J5.1
NetIC1_15: IC1.15 J4.1 U1.36 | length 25.3
  Top Layer w0.127: v3(75.438,66.167) 75.657,66.386 75.657,66.93 77.216,68.489 IC1.15
  Bottom Layer w0.127: U1.36 63.575,51.407 71.945,59.777 71.945,63.309 72.644,64.008 73.787,64.008 74.549,64.77 J4.1 v3(75.438,66.167)
NetIC1_16: IC1.16 J3.1 U1.32 | length 26.6
  Top Layer w0.127: v3(73.279,66.167) 74.483,67.371 74.528,67.371 75.359,68.203 75.659,68.203 75.946,68.489 IC1.16
  Bottom Layer w0.127: U1.32 60.35,55.432 64.373,59.455 64.373,59.866 68.305,63.798 68.944,63.798 69.787,64.641 69.787,66.23 70.485,66.929 71.628,66.929 72.892,65.665 72.892,64.995 73.154,64.733 J3.1 v3(73.279,66.167)
NetIC1_17: IC1.17 J2.1 U1.35 | length 22.9
  Top Layer w0.127: v3(71.247,66.04) 71.393,66.186 72.072,66.186 74.089,68.203 74.389,68.203 74.676,68.489 IC1.17
  Bottom Layer w0.127: U1.35 63.575,52.207 69.532,58.164 69.532,62.777 70.591,63.836 70.701,63.836 71.12,64.254 J2.1 71.247,64.897 v3(71.247,66.04)
NetIC1_18: IC1.18 J1.1 U1.31 | length 21.6
  Top Layer w0.127: v3(68.961,66.167) 70.036,67.242 71.859,67.242 72.715,68.099 72.715,68.964 72.865,69.114 IC1.18
  Bottom Layer w0.127: U1.31 59.55,55.432 68.447,64.33 68.447,64.472 68.709,64.733 J1.1 68.961,64.86 v3(68.961,66.167)
NetLED1_2: LED1.4 LED2.2 | length 90.1
  Top Layer w0.127: v1(47.879,77.216) 47.988,77.107 59.255,77.107 59.4,76.962 70.485,76.962 71.42,77.897 71.433,77.912 71.503,78.008 71.876,78.066 v1(97.497,78.066)
  Bottom Layer w0.127: LED2.2 31.318,78.994 32.109,78.203 36.958,78.203 37.158,78.403 46.692,78.403 v1(47.879,77.216) v1@47.841,77.216 ; v1(97.497,78.066) 98.018,77.546 110.49,77.546 111.281,78.337 113.687,78.337 116.444,75.58 116.444,74.883 116.981,74.346 LED1.4
NetLED1_4: LED1.2 Rin.2 | length 76.5
  Top Layer w0.127: v2(64.853,40.72) 66.417,39.155 82.843,39.155 v1@96.774,53.086
  Bottom Layer w0.127: v2@64.897,40.64 67.691,43.434 Rin.2 ; v1(96.73,53.166) 96.73,55.328 111.29,69.888 111.29,75.025 112.231,75.965 LED1.2
NetLED2_2: LED2.4 LED3.2 | length 37.1
  Bottom Layer w0.127: LED3.2 31.361,42.015 32.221,42.015 34.783,44.577 34.783,74.66 35.918,75.794 LED2.4
NetLED3_2: LED3.4 LED4.2 | length 79.4
  Bottom Layer w0.127: LED3.4 36.261,37.741 36.834,37.741 36.838,37.737 109.711,37.737 110.328,38.354 110.328,39.738 110.782,40.192 110.782,41.576 111.319,42.113 LED4.2
NetLED4_2: LED4.4 LED5.2 | length 43.2
  Top Layer w0.127: v1@115.396,71.369 v1(115.506,71.369) 115.506,74.409 116.608,75.512 116.608,76.883 117.145,77.42 LED5.2
  Bottom Layer w0.127: v1(115.506,71.369) 111.469,67.332 111.469,45.122 115.682,40.909 115.682,39.45 116.219,38.913 LED4.4
NetLED5_2: LED5.4 LED6.2 | length 77.9
  Top Layer w0.127: LED6.2@36.515,78.406 39.428,78.406 39.497,78.338 41.654,78.338 43.575,76.416 60.033,76.416 60.198,76.581 70.783,76.581 73.304,74.059 112.234,74.059 LED5.4
NetLED6_2: LED6.4 LED7.2 | length 36.8
  Top Layer w0.127: LED6.4@30.965,75.743 30.428,75.206 30.428,62.409 33.401,59.436 33.401,43.928 35.168,42.161 35.168,42.015 35.705,41.478 LED7.2
NetLED7_2: LED7.4 LED8.2 | length 88
  Top Layer w0.127: LED7.4 31.101,38.278 32.295,37.084 111.259,37.084 113.471,39.296 113.471,39.303 115.682,41.514 115.682,41.576 116.219,42.113 LED8.2
NetP1_1: P1.1 U1.18 | length 43.6
  Top Layer w0.127: v2(55.372,77.978) 55.88,78.486 61.468,78.486 64.845,81.863 65.226,81.863 P1.1
  Bottom Layer w0.127: U1.18 50.725,49.807 50.234,50.298 50.234,65.728 53.721,69.215 53.721,76.454 55.245,77.978 v2(55.372,77.978)
NetP1_4: P1.4 U1.17 | length 38.1
  Top Layer w0.127: v2(52.959,77.597) 53.05,77.688 53.431,77.688 P1.4
  Bottom Layer w0.127: U1.17 50.725,49.007 49.98,49.752 49.98,65.982 52.959,68.961 v2(52.959,77.597)
NetP1_5: P1.5 U1.16 | length 37.9
  Top Layer w0.127: v2(51.816,77.597) 55.499,81.28 55.499,82.296 P1.5
  Bottom Layer w0.127: U1.16 50.725,48.207 49.657,49.275 49.657,66.294 51.816,68.453 v2(51.816,77.597)
NetP2_2: P2.2 U1.1 USB-UART.26 | length 53
  Top Layer w0.127: v2(62.357,75.946) 63.119,75.184 v2(63.119,56.007)
  Bottom Layer w0.127: P2.2 48.895,79.756 55.372,79.756 58.328,76.8 58.356,76.8 USB-UART.26@58.412,76.744 ; USB-UART.26@58.412,76.567 USB-UART.26@58.412,76.744 ; U1.1 61.15,53.288 63.119,55.257 v2(63.119,56.007) ; v2(62.357,75.946) 61.249,77.054 58.702,77.054 58.412,76.764 USB-UART.26@58.412,76.744
NetP2_3: P2.3 U1.44 USB-UART.25 | length 61.1
  Top Layer w0.127: v2(64.389,56.026) v2(64.389,66.548)
  Bottom Layer w0.127: P2.3 46.651,79.46 55.216,79.46 57.912,76.764 USB-UART.25 57.912,76.014 57.622,75.723 54.961,75.723 54.229,74.992 54.229,71.782 59.462,66.548 v2(64.389,66.548) ; U1.44 62.125,45.007 61.635,45.498 61.635,52.491 61.739,52.595 61.739,52.7 61.635,52.804 61.635,53.21 61.922,53.498 62.642,53.498 64.389,55.245 v2(64.389,56.026)
NetPR1_1: PR1.1 R1.1 SWUP.1 SWUP.2 | length 47.3
  Top Layer w0.127: SWUP.1 SWUP.2 41.454,72.151 66.064,47.541 66.064,46.842 66.425,46.481 PR1.1 R1.1
NetPR2_1: PR2.1 R2.1 SWLEFT.1 SWLEFT.2 | length 55.2
  Top Layer w0.127: SWLEFT.2 SWLEFT.2@31.429,63.246 ; SWLEFT.1 SWLEFT.2@31.429,63.246 ; R2.1 PR2.1 69.473,46.481 68.858,45.865 48.149,45.865 42.47,51.545 42.47,52.206 SWLEFT.2@31.429,63.246
NetPR3_1: PR3.1 R3.1 SWRIGHT.1 SWRIGHT.2 | length 37.9
  Top Layer w0.127: SWRIGHT.1 SWRIGHT.2 64.879,50.056 70.058,50.056 71.128,48.987 71.128,47.491 71.776,46.842 72.282,46.842 PR3.1 72.517,46.608 R3.1
NetPR4_1: PR4.1 R4.1 SWDOWN.1 SWDOWN.2 | length 45.8
  Top Layer w0.127: SWDOWN.2 47.734,45.611 73.144,45.611 74.013,46.481 PR4.1 R4.1
  Bottom Layer w0.127: SWDOWN.2 SWDOWN.1
NetPR5_1: PR5.1 R5.1 SWA.1 SWA.2 | length 43.6
  Top Layer w0.127: PR5.1 R5.1 79.784,49.022 80.818,50.056 87.902,50.056 v6@89.98,52.133 ; SWA.2 SWA.1
  Bottom Layer w0.127: v6(90.043,52.07) 101.942,52.07 SWA.2
NetPR6_1: PR6.1 R6.1 SWB.1 SWB.2 | length 40.5
  Top Layer w0.127: R6.1 PR6.1 81.403,46.481 81.764,46.842 81.764,48.082 83.32,49.638 90.151,49.638 96.37,55.857 96.37,66.206 SWB.2 SWB.1
NetPR7_1: PR7.1 R7.1 SWSEL.1 SWSEL.2 | length 23.8
  Top Layer w0.127: SWSEL.2 71.973,40.096 ; SWSEL.1 71.973,40.096 ; R7.1 PR7.1 82.522,46.481 81.488,45.447 77.324,45.447 71.973,40.096
NetPR8_1: PR8.1 R8.1 SWSTRT.1 SWSTRT.2 | length 20.1
  Top Layer w0.127: SWSTRT.2 81.026,40.132 86.553,45.659 86.553,46.12 86.915,46.482 PR8.1 R8.1
  Bottom Layer w0.127: SWSTRT.2 SWSTRT.1
NetRin_1: Rin.1 U1.9 | length 17.3
  Bottom Layer w0.127: U1.9 54.75,42.582 57.264,40.069 61.658,40.069 66.041,44.451 Rin.1
USB_N: USB-UART.5 USBin.A7 | length 18
  Bottom Layer w0.127: USB-UART.5 60.75,73.414 60.873,73.537 74.322,73.537 76.581,75.796 76.581,76.006 76.655,76.08 76.868,76.08 76.954,76.167 USBin.A7
USB_P: USB-UART.4 USBin.A6 | length 17.6
  Bottom Layer w0.127: USB-UART.4 60.75,73.914 60.873,73.791 74.217,73.791 76.327,75.901 76.327,76.006 76.253,76.08 76.041,76.08 75.954,76.167 USBin.A6
pads on no net: LED8.4 U1.2 U1.3 U1.4 U1.5 U1.8 U1.12 U1.13 U1.19 U1.20 U1.21 U1.22 U1.23 U1.24 U1.25 U1.26 U1.27 U1.30 U1.33 U1.34 U1.37 U1.38 U1.39 U1.40 U1.41 U1.42 U1.43 USB-UART.1 USB-UART.2 USB-UART.10 USB-UART.11 USB-UART.12 USB-UART.13 USB-UART.14 USB-UART.15 USB-UART.16 USB-UART.17 USB-UART.18 USB-UART.19 USB-UART.20 USB-UART.21 USB-UART.22 USB-UART.23 USB-UART.24 USB-UART.27 USB-UART.28 USBin.1 USBin.2 USBin.3 USBin.4 USBin.A2 USBin.A3 USBin.A5 USBin.A8 USBin.A10 USBin.A11 USBin.B1 USBin.B2 USBin.B3 USBin.B4 USBin.B5 USBin.B6 USBin.B7 USBin.B8 USBin.B9 USBin.B10 USBin.B11 USBin.B12

## Polygon pours and split planes (outlines as drawn)
GND on Top Layer "GND_TOP" (solid, pour order 0): 25.273,32.893 25.273,84.836 125.222,84.836 125.222,32.893
GND on Bottom Layer "GND_BOT" (solid, pour order 1): 25.273,32.893 25.273,84.836 125.222,84.836 125.222,32.893

## Silkscreen, mask and mechanical layers (free items; w line width, h text height)
Top Overlay:
  the board outline again, w0.254
  text "PGC" at 55.395,80.622 h0.75 r270
  text "PGD" at 58.062,80.622 h0.75 r270
  text "GND" at 60.602,80.622 h0.75 r270
  text "VDD" at 63.015,80.622 h0.75 r270
  text "MCLR" at 65.428,80.622 h0.75 r270
  text "GND" at 40.79,80.495 h0.75 r270
  text "TX" at 43.457,80.495 h0.75 r270
  text "RX" at 45.87,80.495 h0.75 r270
  text "VDD" at 48.41,80.495 h0.75 r270
  text "Vazi RGB Controller / v1.0.0" at 82.296,78.613 h1.52
  text "Ratik Kapoor / Adam Pezoulas" at 82.169,72.644 h1.52
  text "C1-C8" at 88.572,54.409 h1
  text "R1-R8" at 88.953,49.329 h1
  text "PR1-PR8" at 88.572,45.265 h1
Bottom Overlay:
  text "J1-J8" at 90.371,63.299 h1